# EAGLE board IR4427 (EAGLE 9.0.0)
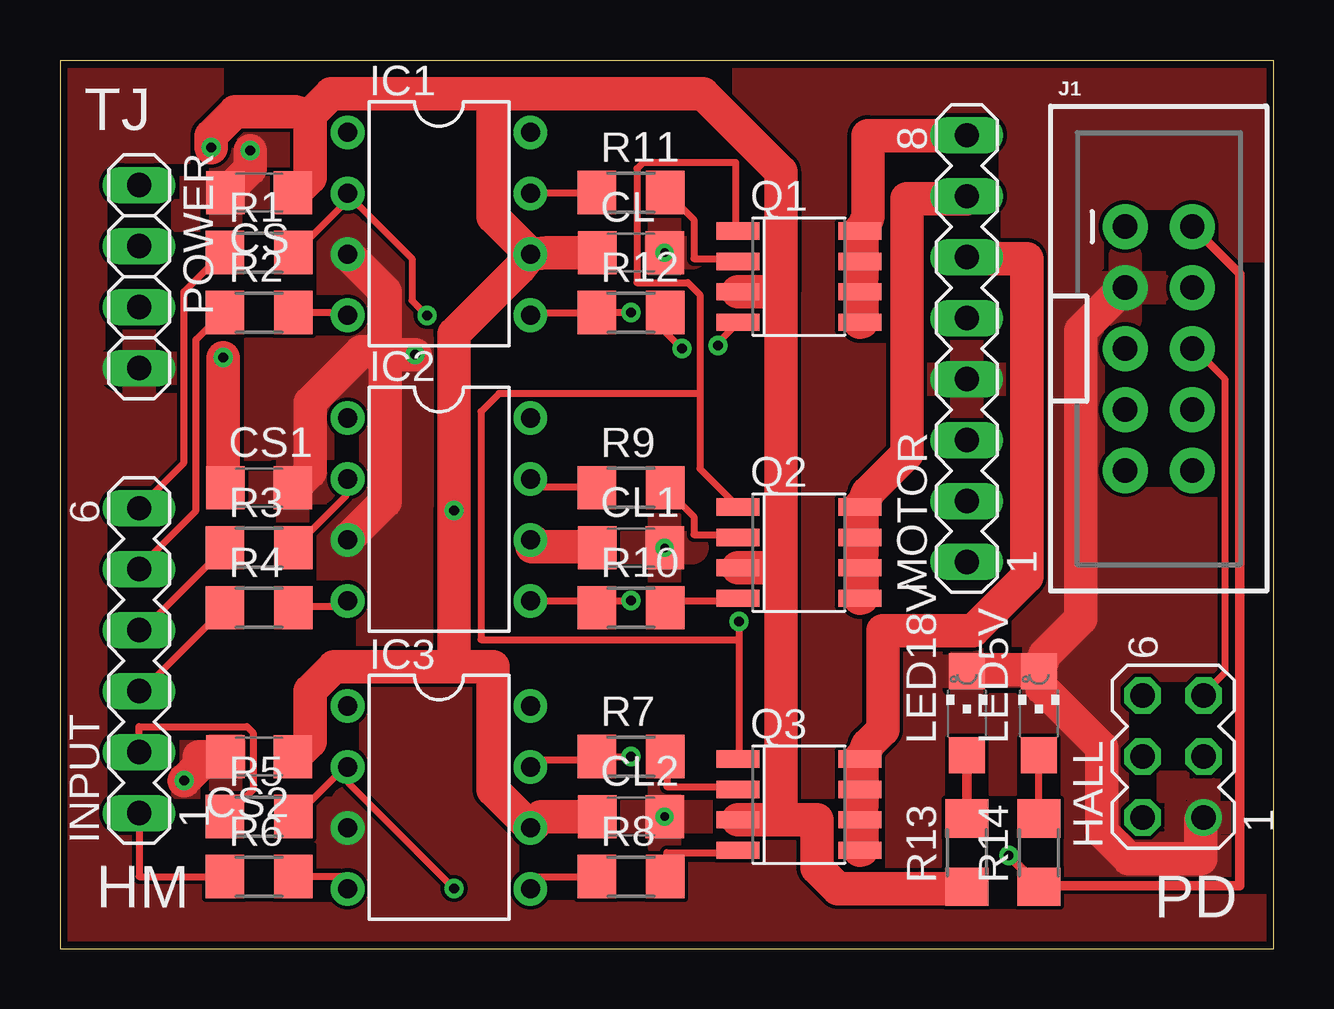
[diagram p0: board, top side]
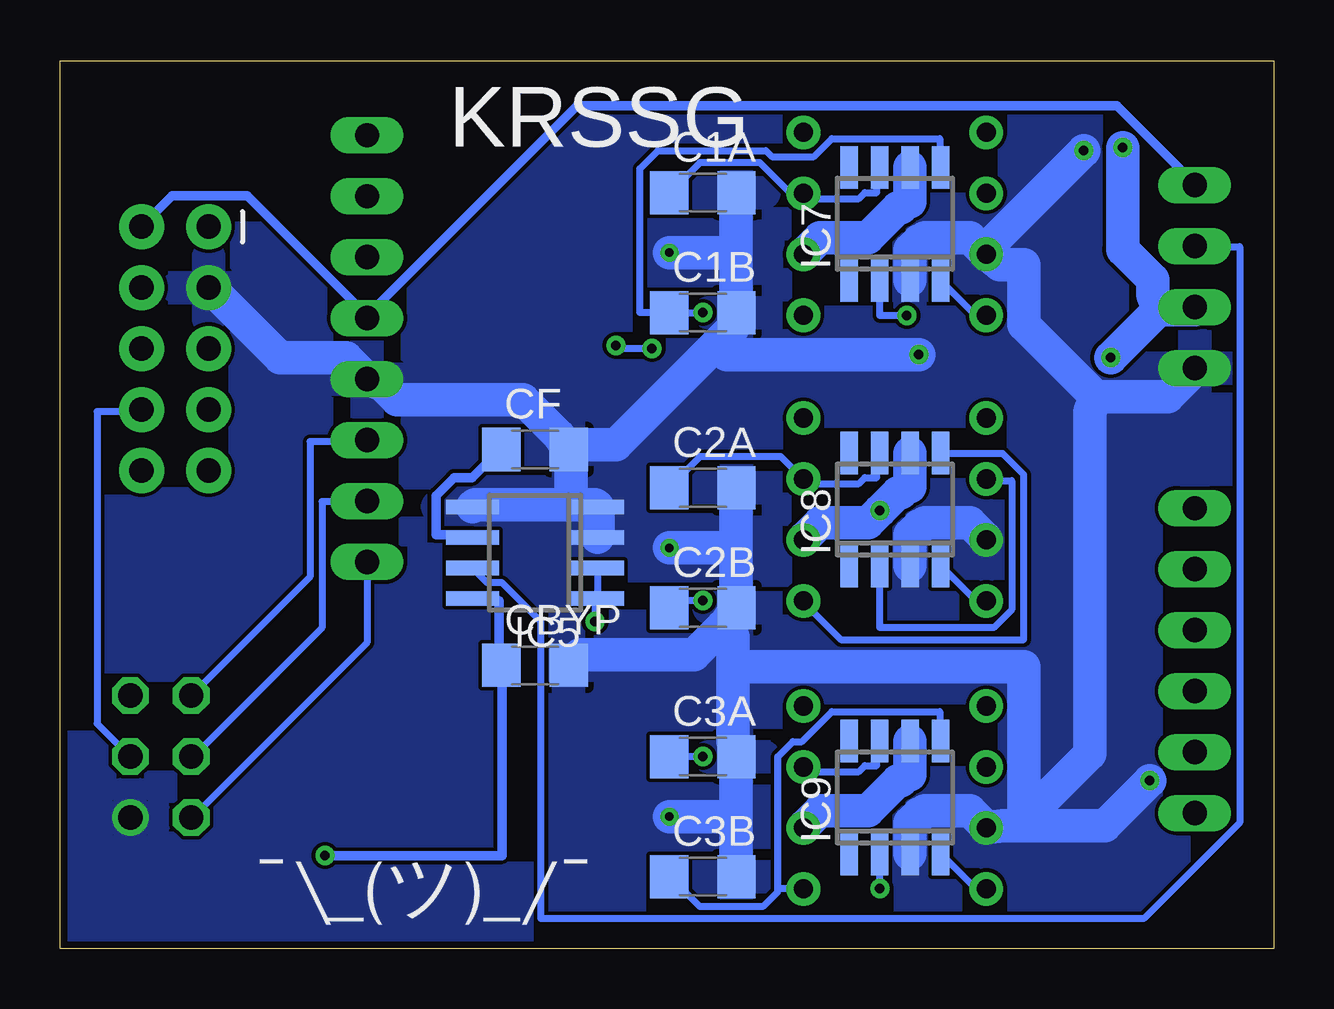
[diagram p1: board, bottom side, seen from below]

Size 50.6 x 37 mm. Coordinates in mm from the lower left corner, seen from the top.
Outline: 0,0 50.6,0 50.6,37 0,37 0,0
Copper layers (1*16): Top 0.035mm / dielectric 1.5mm / Bottom 0.035mm
Design rules "default *": minimum track width 6mil, minimum drill 0.35mm, track to track 6mil, track to pad 6mil, pad to pad 6mil, via to via 6mil, smd to smd 6mil, copper to edge 0.3mm, drill to drill 6mil, minimum pad ring 10mil, minimum via ring 8mil, stop-mask expansion 4mil, vias tented up to drill 0mil, thermal gap 10mil
Net classes: 0 18v: width 1.4 mm, drill 0.4 mm, clearance 0.152 mm; 1 5v: width 0.4 mm, drill 0.4 mm, clearance 0.152 mm; 2 motor: width 1.4 mm, drill 0.4 mm, clearance 0.152 mm; 3 signal: width 0.3 mm, drill 0.4 mm, clearance 0.152 mm; 4 gnd: width 1.4 mm, drill 0.4 mm, clearance 0.152 mm

## Footprints (pad centres in the part's own frame; a part is rotated, then mirrored left to right if it is on the bottom)
C1206 = smd 1.6 x 1.8: 1 -1.4,0; 2 1.4,0
MA03-2 = drill 1.016: 1 -2.54,-1.27 | drill 1.016 octagon: 2 -2.54,1.27; 3 0,-1.27; 4 0,1.27; 5 2.54,-1.27; 6 2.54,1.27
DIL08 = drill 0.8 pad 1.4: 1 -3.81,-3.81; 2 -1.27,-3.81; 3 1.27,-3.81; 4 3.81,-3.81; 5 3.81,3.81; 6 1.27,3.81; 7 -1.27,3.81; 8 -3.81,3.81
SOIC8 = smd 0.6 x 2.2: 1 -1.905,-2.6; 2 -0.635,-2.6; 3 0.635,-2.6; 4 1.905,-2.6; 5 1.905,2.6; 6 0.635,2.6; 7 -0.635,2.6; 8 -1.905,2.6
SO08 = smd 0.72 x 1.78: 1 -1.905,-2.35; 2 -0.635,-2.35; 3 0.635,-2.35; 4 1.905,-2.35; 5 1.905,2.35; 6 0.635,2.35; 7 -0.635,2.35; 8 -1.905,2.35
MA06-1 = drill 1.016 long: 1 -6.35,0; 2 -3.81,0; 3 -1.27,0; 4 1.27,0; 5 3.81,0; 6 6.35,0
2X5-SHROUDED_LOCK = drill 1.016 pad 1.88: 1 -1.397,5.08; 2 1.397,5.08; 3 -1.397,2.54; 4 1.397,2.54; 5 -1.397,0; 6 1.397,0; 7 -1.397,-2.54; 8 1.397,-2.54; 9 -1.397,-5.08; 10 1.397,-5.08
CHIPLED_1206 = smd 1.5 x 1.5: A 0,-1.75; C 0,1.75
MA08-1 = drill 1.016 long: 1 -8.89,0; 2 -6.35,0; 3 -3.81,0; 4 -1.27,0; 5 1.27,0; 6 3.81,0; 7 6.35,0; 8 8.89,0
1X04 = drill 1.016 long: 1 -3.81,0; 2 -1.27,0; 3 1.27,0; 4 3.81,0
SO08-IRF = smd 0.72 x 1.78: 1 -1.905,-2.543; 2 -0.635,-2.543; 3 0.635,-2.543; 4 1.905,-2.543; 5 1.905,2.543; 6 0.635,2.543; 7 -0.635,2.543; 8 -1.905,2.543
R1206 = smd 1.6 x 1.803: 1 -1.422,0; 2 1.422,0

## Placement (x,y rotation side)
C1A  1n  [C1206]  23.8,31.5 0 bottom
C1B  1n  [C1206]  23.8,26.5 0 bottom
C2A  1n  [C1206]  23.8,19.2 0 bottom
C2B  1n  [C1206]  23.8,14.2 0 bottom
C3A  1n  [C1206]  23.8,8 0 bottom
C3B  1n  [C1206]  23.8,3 0 bottom
CBYP  .1u  [C1206]  30.8,11.8 0 bottom
CF  1n  [C1206]  30.8,20.8 0 bottom
CL  4.7u  [C1206]  23.8,29 0 top
CL1  4.7u  [C1206]  23.8,16.7 0 top
CL2  4.7u  [C1206]  23.8,5.5 0 top
CS  0.1u  [C1206]  8.3,31.5 180 top
CS1  0.1u  [C1206]  8.3,19.2 0 top
CS2  0.1u  [C1206]  8.3,8 180 top
HALL  [MA03-2]  46.4,8 90 top
IC1  IR4427  [DIL08]  15.8,30.2 270 top
IC2  IR4427  [DIL08]  15.8,18.3 270 top
IC3  IR4427  [DIL08]  15.8,6.3 270 top
IC5  ACS712-LC  [SOIC8]  30.8,16.5 90 bottom
IC7  IR4427S  [SO08]  15.8,30.2 0 bottom
IC8  IR4427S  [SO08]  15.8,18.3 0 bottom
IC9  IR4427S  [SO08]  15.8,6.3 0 bottom
INPUT  [MA06-1]  3.3,12 90 top
J1  [2X5-SHROUDED_LOCK]  45.8,25 0 top
LED5V  LEDCHIPLED_1206  [CHIPLED_1206]  40.8,9.8 0 top
LED18V  LEDCHIPLED_1206  [CHIPLED_1206]  37.8,9.8 0 top
MOTOR  [MA08-1]  37.8,25 90 top
POWER  [1X04]  3.3,28 270 top
Q1  IRF7389  [SO08-IRF]  30.8,28 270 top
Q2  IRF7389  [SO08-IRF]  30.8,16.5 270 top
Q3  IRF7389  [SO08-IRF]  30.8,6 270 top
R1  [R1206]  8.3,29 0 top
R2  [R1206]  8.3,26.5 0 top
R3  [R1206]  8.3,16.7 0 top
R4  [R1206]  8.3,14.2 0 top
R5  [R1206]  8.3,5.5 0 top
R6  [R1206]  8.3,3 0 top
R7  150  [R1206]  23.8,8 0 top
R8  150  [R1206]  23.8,3 0 top
R9  150  [R1206]  23.8,19.2 0 top
R10  150  [R1206]  23.8,14.2 0 top
R11  150  [R1206]  23.8,31.5 0 top
R12  150  [R1206]  23.8,26.5 0 top
R13  1k  [R1206]  37.8,4 90 top
R14  330  [R1206]  40.8,4 90 top

## Library data of the parts
C1A C1B C2A C2B C3A C3B CBYP CF CL CL1 CL2 CS CS1 CS2 = eagle-ltspice; SPICEMODEL: NONE; SPICEPREFIX: C
HALL INPUT MOTOR = con-lstb; OC_FARNELL: unknown; OC_NEWARK: unknown
IC1-IC3 = ir; MF: INTERNATIONAL RECTIFIER(IR); MPN: IR4427; OC_FARNELL: 1023267; OC_NEWARK: 27C6914
IC5 = allegro-2
IC7-IC9 = ir; MF: INTERNATIONAL RECTIFIER(IR); MPN: IR4427STRPBF; OC_FARNELL: 8639094; OC_NEWARK: 63J7933
J1 = SparkFun-Connectors; PROD_ID: CONN-08671; SF_ID: PRT-08506
LED5V LED18V = audio amplifier example
POWER = pinhead
Q1-Q3 = transistor-fet
R1-R14 = eagle-ltspice; SPICEMODEL: NONE; SPICEPREFIX: R

## Nets
1A [signal]: INPUT.6 R1.1
1B [signal]: INPUT.5 R2.1
1N [signal]: Q1.2 R11.2
1P [signal]: Q1.4 R12.2
2A [signal]: INPUT.4 R3.1
2B [signal]: INPUT.3 R4.1
2N [signal]: Q2.2 R9.2
2P [signal]: Q2.4 R10.2
3A [signal]: INPUT.2 R5.1
3B [signal]: INPUT.1 R6.1
3N [signal]: Q3.2 R7.2
3P [signal]: Q3.4 R8.2
A [signal]: HALL.5 J1.6
ACS_OUT [signal]: IC5.7 POWER.2
B [signal]: HALL.3 J1.8
GND [gnd]: C1A.2 C1B.2 C2A.2 C2B.2 C3A.2 C3B.2 CBYP.2 CF.2 CL1.2 CL2.2 CL.2 CS1.2 CS2.2 CS.2 HALL.1 IC1.3 IC2.3 IC3.3 IC5.3 IC5.4 IC5.5 IC7.3 IC8.3 IC9.3 J1.3 LED5V.C LED18V.C MOTOR.4 POWER.4
H1 [signal]: HALL.6 MOTOR.3
H2 [signal]: HALL.4 MOTOR.2
H3 [signal]: HALL.2 MOTOR.1
IN_1A [signal]: IC1.2 IC7.2 R1.2
IN_1B [signal]: IC1.4 IC7.4 R2.2
IN_2A [signal]: IC2.2 IC8.2 R3.2
IN_2B [signal]: IC2.4 IC8.4 R4.2
IN_3A [signal]: IC3.2 IC9.2 R5.2
IN_3B [signal]: IC3.4 IC9.4 R6.2
M1 [motor]: MOTOR.8 Q1.5 Q1.6 Q1.7 Q1.8
M2 [motor]: MOTOR.7 Q2.5 Q2.6 Q2.7 Q2.8
M3 [motor]: MOTOR.6 Q3.5 Q3.6 Q3.7 Q3.8
N$1 [signal]: IC5.1 IC5.2 Q1.1 Q2.1 Q3.1
N$2 [5v]: LED18V.A R13.2
N$3 [5v]: CF.1 IC5.6
N$4 [signal]: LED5V.A R14.2
OUT_1A [signal]: C1A.1 IC1.7 IC7.7 R11.1
OUT_1B [signal]: C1B.1 IC1.5 IC7.5 R12.1
OUT_2A [signal]: C2A.1 IC2.7 IC8.7 R9.1
OUT_2B [signal]: C2B.1 IC2.5 IC8.5 R10.1
OUT_3A [signal]: C3A.1 IC3.7 IC9.7 R7.1
OUT_3B [signal]: C3B.1 IC3.5 IC9.5 R8.1
VCC_5V [5v]: CBYP.1 IC5.8 J1.2 MOTOR.5 POWER.1 R14.1
VCC_18 [motor]: CL1.1 CL2.1 CL.1 CS1.1 CS2.1 CS.1 IC1.6 IC2.6 IC3.6 IC7.6 IC8.6 IC9.6 POWER.3 Q1.3 Q2.3 Q3.3 R13.1

## Tracks (layer width: path | path; a pad name or v marks a point on that pad's centre or on a via)
1A
  Top 0.3: R1.1 6.8,29 5.18,27.38 5.18,20.25 3.3,18.38 INPUT.6
1B
  Top 0.3: R2.1 6.8,26.5 5.68,25.38 5.68,18.25 3.3,15.88 INPUT.5
1N
  Top 0.3: Q1.2 28.18,28.75 26.43,28.75 26.43,30.38 25.3,31.5 R11.2
1P  (via drill 0.4)
  Top 0.3: v27.43,25.12 27.43,25.25 28.18,26 Q1.4 | v25.93,25 25.3,25.62 25.3,26.5 R12.2
  Bottom 0.3: v27.43,25.12 27.3,25 v25.93,25
2A
  Top 0.3: R3.1 6.8,16.62 3.55,13.38 3.3,13.38 INPUT.4
2B
  Top 0.3: R4.1 6.8,14.12 3.3,10.62 INPUT.3
2N
  Top 0.3: Q2.2 28.18,17.25 26.43,17.25 26.43,18 25.3,19.12 R9.2
2P
  Top 0.3: Q2.4 28.18,14.5 25.3,14.5 25.3,14.25 R10.2
3A
  Top 0.3: INPUT.2 3.3,9.25 7.8,9.25 8.05,9 8.05,6.62 6.93,5.5 R5.1
3B
  Top 0.3: R6.1 3.3,3 INPUT.1
3N
  Top 0.3: Q3.2 28.18,6.75 25.3,6.75 25.3,8 R7.2
3P
  Top 0.3: Q3.4 28.18,4 25.3,4 25.3,3 R8.2
A
  Top 0.3: HALL.5 47.67,10.62 48.55,11.5 48.55,23.75 47.3,25 J1.6
ACS_OUT
  Bottom 0.3: IC5.7 33.3,15.75 32.8,15.25 32.17,15.25 30.55,13.62 30.55,1.25 5.43,1.25 1.43,5.25 1.43,29.25 3.3,29.25 POWER.2
B
  Bottom 0.3: HALL.3 49.05,9.38 49.05,22.38 47.3,22.38 J1.8
GND  (via drill 0.35, 0.4)
  Top 1.4: CS2.2 5.8,8 5.8,7.62 v5.18,7 | 13.55,24.88 12.55,24.88 10.43,22.75 10.43,19.88 9.8,19.25 CS1.2 | 13.55,24.88 13.55,27.38 12.05,28.88 IC1.3 | v7.93,33.25 7.93,32.5 6.93,31.5 CS.2 | 13.55,24.88 13.55,18.62 12.05,17.12 IC2.3 | LED18V.C 37.8,11.62 40.8,11.62 LED5V.C | LED5V.C 40.92,10.88 43.42,8.38 43.42,4.88 44.55,3.75 47.55,3.75 47.55,5.38 HALL.1 | LED5V.C 41.05,12.25 42.55,13.75 42.55,25.75 44.3,27.5 J1.3 | v14.8,24.75 14.18,24.75 13.55,24.88
  Bottom 1.4: IC9.3 15.18,4 15.18,5.25 14.8,5.62 14.68,5.62 14.55,5.75 12.68,5.75 12.05,5.12 IC3.3 11.3,5.12 10.43,5.12 | v5.18,7 7.05,5.12 10.43,5.12 | 22.43,5.4 22.43,8 C3A.2 22.55,8.62 22.55,11.75 | 22.43,5.4 22.43,3 C3B.2 | 22.43,16.8 22.43,19.12 C2A.2 | 22.43,16.8 22.43,14.25 C2B.2 22.8,13.62 22.99,13.44 | 22.99,13.44 24.18,12.25 28.93,12.25 29.3,11.88 CBYP.2 | 22.55,11.75 22.55,13 22.99,13.44 | 10.43,6 10.43,11.75 22.55,11.75 | 10.43,6 10.43,5.12 | IC8.3 15.18,16 15.18,17.25 14.8,17.62 14.68,17.62 14.55,17.75 12.68,17.75 12.05,17.12 IC2.3 | IC7.3 15.18,27.88 15.18,29.12 14.8,29.5 14.68,29.5 14.55,29.62 12.68,29.62 12.05,29 IC1.3 | v7.93,33.25 11.68,29.5 IC1.3 | 7.43,23 4.43,23 3.3,24.12 POWER.4 | 7.43,23 10.43,26 10.43,28.5 11.43,28.5 IC1.3 | J1.3 44.3,27.5 41.42,24.62 38.67,24.62 37.8,23.75 MOTOR.4 37.17,23.5 36.55,22.88 31.3,22.88 29.8,21.38 CF.2 | 22.43,29 22.43,31.5 C1A.2 | 22.43,29 22.43,26.5 C1B.2 22.55,25.88 23.24,25.19 | 29.3,18.5 29.3,20.75 CF.2 | 29.3,18.5 28.3,18.5 IC5.4 28.18,17.75 28.18,17.25 IC5.3 | 29.3,18.5 33.3,18.5 IC5.5 | 23.24,25.19 27.43,21 28.68,21 CF.2 | v14.8,24.75 22.8,24.75 23.24,25.19 | 10.43,6 9.8,6 7.68,8.12 7.68,22.38 7.43,23 | CL2.2 22.53,5.5 22.43,5.4 | CL.2 22.43,29 | CL1.2 22.53,16.7 22.43,16.8
  other vias: 25.2,5.5 25.2,29 25.2,16.7
  pour Bottom: -0.9,37.7 -0.9,-1.4 -0.6,-1.7 51.8,-1.7 53.6,0.1 53.6,35.8 50.9,38.5 -0.1,38.5
  pour Top: -2,38.1 -2,-3.7 1.2,-6.9 55,-6.9 62.3,0.4 62.3,33 53.6,41.7 1.6,41.7
H1
  Bottom 0.3: HALL.6 45.05,10.62 40.17,15.5 40.17,21.12 37.8,21.12 MOTOR.3
H2
  Bottom 0.3: HALL.4 45.05,8 39.67,13.38 39.67,18.62 37.8,18.62 MOTOR.2
H3
  Bottom 0.3: MOTOR.1 37.8,12.75 45.05,5.5 HALL.2
IN_1A  (via drill 0.4)
  Top 0.3: v15.3,26.38 14.68,27 14.68,28.75 12.05,31.38 IC1.2 12.05,31.25 9.8,29 R1.2
  Bottom 0.3: v15.3,26.38 16.43,26.38 16.43,27.75 IC7.2
IN_1B
  Top 0.3: R2.2 11.93,26.5 IC1.4
  Bottom 0.3: IC7.4 13.8,27.75 12.55,26.5 12.05,26.5 IC1.4
IN_2A
  Top 0.3: R3.2 9.8,16.75 11.93,18.88 11.93,19.5 IC2.2
  Bottom 0.3: IC8.2 16.43,15.88 16.43,13.38 11.68,13.38 10.93,14.12 10.93,19.5 11.93,19.5 IC2.2
IN_2B
  Top 0.3: R4.2 9.8,14.25 11.93,14.25 11.93,14.38 IC2.4
  Bottom 0.3: IC8.4 13.8,15.88 12.43,14.5 12.05,14.5 IC2.4
IN_3A  (via drill 0.4)
  Top 0.3: v16.43,2.5 12.05,6.88 12.05,7.5 IC3.2 11.93,7.62 9.8,5.5 R5.2
  Bottom 0.3: v16.43,2.5 16.43,3.88 IC9.2
IN_3B
  Top 0.3: R6.2 11.93,3 11.93,2.5 IC3.4
  Bottom 0.3: IC9.4 13.8,3.88 12.43,2.5 12.05,2.5 IC3.4
M1
  Top 1.4: Q1.5 33.42,26.12 33.42,27.25 Q1.6 33.42,28 33.42,28.62 | 33.42,28.62 Q1.7 | 33.42,29.88 Q1.8 | 33.42,29.88 33.42,28.62 | MOTOR.8 37.8,33.88 33.67,33.88 33.67,30.5 33.42,29.88
M2
  Top 1.4: Q2.5 33.42,14.62 33.42,15.75 Q2.6 33.42,16.5 33.42,17.12 | 33.42,17.12 Q2.7 | 33.42,18.38 Q2.8 | 33.42,18.38 33.42,17.12 | MOTOR.7 37.8,31.25 35.3,31.25 35.3,20.62 33.67,19 33.42,18.38
M3
  Top 1.4: Q3.5 33.42,4.12 33.42,5.25 Q3.6 33.42,6 33.42,6.62 | 33.42,6.62 Q3.7 | 33.42,7.88 Q3.8 | 33.42,7.88 33.42,6.62 | MOTOR.6 37.8,28.75 40.3,28.75 40.3,15.5 38.05,13.25 34.3,13.25 34.3,9.12 33.67,8.5 33.42,7.88
N$1  (via drill 0.4)
  Top 0.3: v28.3,13.62 28.3,12.88 | 28.3,12.88 28.3,8 Q3.1 | 26.68,23.12 26.68,27.25 26.18,27.75 24.05,27.75 24.05,32.5 24.3,32.75 28.18,32.75 28.18,30 Q1.1 | 26.68,23.12 26.68,20 28.18,18.5 Q2.1 | 28.3,12.88 17.55,12.88 17.55,22.38 18.3,23.12 26.68,23.12
  Bottom 0.3: v28.3,13.62 28.3,14.5 IC5.1 28.18,14.62 28.18,15.75 IC5.2
N$2
  Top 0.4: R13.2 LED18V.A
N$3
  Bottom 0.4: CF.1 32.3,20.75 33.42,19.62 34.17,19.62 34.92,18.88 34.92,17.25 33.42,17.25 IC5.6
N$4
  Top 0.3: R14.2 LED5V.A
OUT_1A
  Top 0.3: R11.1 19.68,31.5 IC1.7
  Bottom 0.3: IC7.7 16.55,32.5 16.55,31.5 17.05,31.5 17.3,31.25 19.43,31.25 19.55,31.38 IC1.7 19.68,31.5 20.18,31.5 21.43,32.75 23.93,32.75 25.18,31.5 C1A.1
OUT_1B  (via drill 0.4)
  Top 0.3: IC1.5 19.68,26.5 R12.1 v23.8,26.5
  Bottom 0.3: IC7.5 13.93,32.62 13.93,33.75 18.43,33.75 19.18,33 20.93,33 21.18,33.25 25.68,33.25 26.43,32.5 26.43,26.5 C1B.1 v23.8,26.5
OUT_2A
  Top 0.3: R9.1 22.3,19.25 19.68,19.25 19.68,19.5 IC2.7
  Bottom 0.3: IC8.7 16.55,20.62 16.55,19.62 17.05,19.62 17.3,19.38 19.43,19.38 19.55,19.5 IC2.7 19.68,19.62 20.55,20.5 23.93,20.5 25.18,19.25 C2A.1
OUT_2B  (via drill 0.4)
  Top 0.3: v23.8,14.5 22.43,14.5 22.43,14.25 R10.1 22.3,14.5 19.68,14.5 IC2.5
  Bottom 0.3: v23.8,14.5 24.93,14.5 25.18,14.25 C2B.1 | IC8.5 13.8,20.62 11.3,20.62 10.43,19.75 10.43,12.88 18.05,12.88 19.55,14.38 IC2.5
OUT_3A  (via drill 0.4)
  Top 0.3: v23.8,8 R7.1 22.3,7.88 19.68,7.88 19.68,7.62 IC3.7
  Bottom 0.3: v23.8,8 C3A.1 | IC9.7 16.55,8.62 16.55,7.62 17.05,7.62 17.3,7.38 19.43,7.38 19.55,7.5 IC3.7
OUT_3B
  Top 0.3: R8.1 19.68,3 19.68,2.5 IC3.5
  Bottom 0.3: 20.68,2.5 20.68,8 20.05,8.62 19.68,8.62 18.43,9.88 13.93,9.88 13.93,8.75 IC9.5 | 20.68,2.5 19.68,2.5 IC3.5 | C3B.1 25.18,3 23.93,1.75 21.3,1.75 20.68,2.38 20.68,2.5
VCC_5V  (via drill 0.4)
  Top 0.4: J1.2 47.3,30 49.17,28.12 49.17,2.62 40.8,2.62 R14.1 40.67,2.75 v39.55,3.88
  Bottom 0.4: IC5.8 33.3,14.5 32.3,14.5 32.3,11.88 CBYP.1 32.17,11.62 32.17,3.88 v39.55,3.88 | J1.2 47.17,30.12 45.92,31.38 42.8,31.38 37.8,26.38 MOTOR.5 37.67,26.5 29.05,35.12 6.55,35.12 3.3,31.88 POWER.1
VCC_18  (via drill 0.4)
  Top 1.4: 30.05,5.38 31.55,5.38 31.55,3.38 32.42,2.5 37.8,2.5 R13.1 | 30.05,5.38 28.3,5.38 Q3.3 | 30.05,15.88 28.3,15.88 Q2.3 | 30.05,5.38 30.05,15.88 | 30.05,27.38 28.3,27.38 Q1.3 | 30.05,15.88 30.05,27.38 | CL1.1 22.3,16.75 19.68,16.75 19.68,17 IC2.6 | 16.43,11.75 18.05,11.75 18.05,6.62 19.55,5.12 IC3.6 20.05,5.5 CL2.1 | 16.43,11.75 11.43,11.75 10.43,10.75 10.43,8.62 9.8,8 CS2.1 | 16.43,11.75 v16.43,18.25 16.43,25.62 19.18,28.38 IC1.6 | v6.8,24.62 6.8,19.25 CS1.1 | 10.43,34.75 10.43,32.12 9.8,31.5 CS.1 | 10.43,34.75 11.3,35.62 18.05,35.62 | 18.05,35.62 18.05,30.5 19.55,29 IC1.6 | CL.1 20.3,29 IC1.6 | v6.3,33.38 6.3,33.88 7.3,34.88 9.8,34.88 10.43,34.75 | 30.05,27.38 30.05,32.38 26.8,35.62 18.05,35.62
  Bottom 1.4: IC8.6 15.18,20.62 15.18,19.25 15.3,19.25 15.55,19 15.68,19 v16.43,18.25 16.93,17.75 18.93,17.75 19.55,17.12 IC2.6 | IC9.6 15.18,8.62 15.18,7.25 15.3,7.25 15.55,7 15.68,7 16.93,5.75 18.93,5.75 19.55,5.12 IC3.6 | 4.8,26.62 v6.8,24.62 | 4.8,26.62 3.3,26.62 POWER.3 | IC7.6 15.18,32.5 15.18,31.12 15.3,31.12 15.55,30.88 15.68,30.88 16.93,29.62 18.93,29.62 19.55,29 IC1.6 | v6.3,33.38 6.3,29.12 5.05,27.88 5.05,27.25 4.8,26.62

## Text on the board
tNames: TJ | HM | PD
bNames: KRSSG | ¯\_(ツ)_/¯